# EAGLE board Adafruit_TMP117 (EAGLE 9.6.2)
REV: B
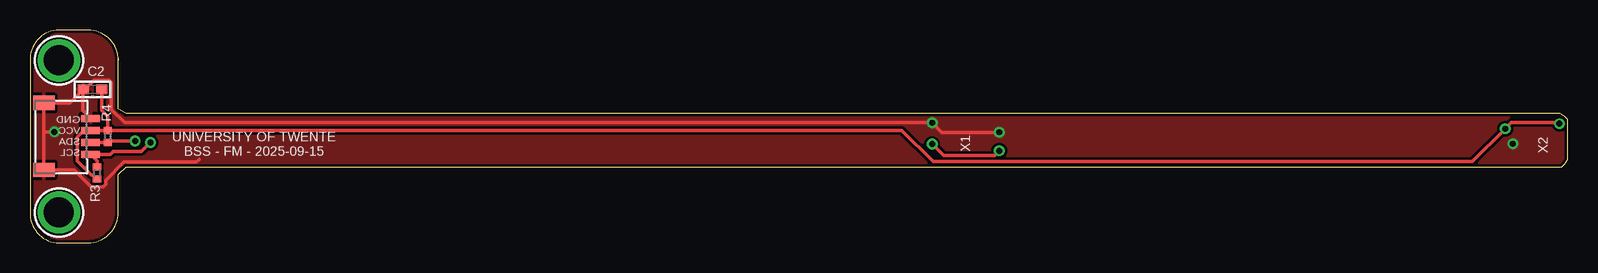
[diagram p0: board, top side]
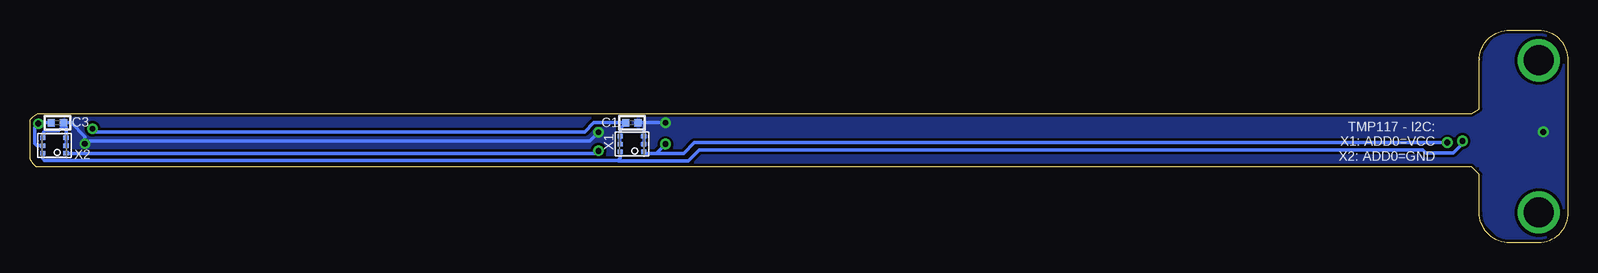
[diagram p1: board, bottom side, seen from below]

Size 128.14 x 17.78 mm. Coordinates in mm from the lower left corner, seen from the top.
Outline: 7.37,15.24 7.37,11.18 8,10.79 127.51,10.79 127.89,10.54 128.14,10.29 128.14,6.99 127.89,6.6 127.64,6.35 8,6.35 7.37,5.71 7.37,2.54 arc-90 4.83,0 2.41,0 arc-90 0,2.54 0,15.24 arc-90 2.41,17.78 4.83,17.78 arc-90 7.37,15.24
Outline: 7.37,15.37 7.37,15.24
Copper layers (1*16): Top 0.035mm / dielectric 1.5mm / Bottom 0.035mm
Design rules "adafruit *": minimum track width 8mil, minimum drill 15.5mil, track to track 8mil, track to pad 8mil, pad to pad 8mil, via to via 8mil, smd to smd 8mil, copper to edge 10mil, drill to drill 8mil, minimum pad ring 10mil, minimum via ring 8mil, stop-mask expansion 2mil, vias tented up to drill 20mil, thermal gap 10mil
Net classes: 1 highpower: width 0.305 mm, drill 0.483 mm; 2 lowpower: width 0.254 mm, drill 0.483 mm
bRestrict: area 77.3,7.2 to 78.6,9.5; area 125.5,7.1 to 126.7,9.1

## Footprints (pad centres in the part's own frame; a part is rotated, then mirrored left to right if it is on the bottom)
_0402 = smd 0.6 x 0.6: 1 -0.508,0; 2 0.508,0
_0603 = smd 0.9 x 0.8: 1 -0.762,0; 2 0.762,0
JST_SH4 = smd 0.6 x 1.55: 1 -1.5,2.514; 2 -0.5,2.514; 3 0.5,2.514; 4 1.5,2.514 | smd 1.2 x 1.8: MT1 -2.8,-1.386; MT2 2.8,-1.386
R0402 = smd 0.6 x 0.7: 1 -0.5,0; 2 0.5,0
MOUNTINGHOLE_2.5_PLATED = drill 2.5 pad 3.2: P$1 0,0
WSON-6 = smd 0.45 x 0.3: 1 -0.975,0.65; 2 -0.975,0; 3 -0.975,-0.65; 4 0.975,-0.65; 5 0.975,0; 6 0.975,0.65

## Placement (x,y rotation side)
C1  0.1uF  [_0402]  77.98,10.03 0 bottom
C2  10uF  [_0603]  5.21,12.83 180 top
C3  0.1uF  [_0402]  125.86,10.03 0 bottom
CONN4  STEMMA_I2C_QT  [JST_SH4]  2.54,8.89 270 top
R3  10k  [R0402]  5.59,5.84 270 top
R4  10k  [R0402]  6.48,8.89 90 top
U$1  MOUNTINGHOLE2.5  [MOUNTINGHOLE_2.5_PLATED]  2.41,15.24 0 top
U$19  MOUNTINGHOLE2.5  [MOUNTINGHOLE_2.5_PLATED]  2.41,2.54 0 top
X1  TMP117_WSON  [WSON-6]  77.98,8.26 180 bottom
X2  TMP117_WSON  [WSON-6]  126.11,8.13 180 bottom

## Library data of the parts
C1-C3 CONN4 = microbuilder
R3 R4 = rcl; SPICEPREFIX: R
U$1 U$19 = microbuilder; BOM: EXCLUDE
X1 X2 = adafruit_sensor

## Nets
GND [highpower]: C1.2 C2.2 C3.2 CONN4.1 CONN4.MT1 CONN4.MT2 X1.2 X1.3 X2.2 X2.3 X2.4
SCL: CONN4.4 R3.1 X1.1 X2.1
SDA: CONN4.3 R4.1 X1.6 X2.6
VCC [highpower]: C1.1 C2.1 C3.1 CONN4.2 R3.2 R4.2 X1.4 X1.5 X2.5

## Tracks (layer width: path | path; a pad name or v marks a point on that pad's centre or on a via)
GND  (via drill 0.48)
  Top 0.305: 1.15,9.14 CONN4.MT1 3.31,11.69 4.38,12.76 | 1.15,9.14 CONN4.MT2 3.69,6.09 5.09,4.69 6.08,4.69 6.29,4.89 6.29,5.22 7.83,6.76 13.87,6.76 14.1,6.99 | 1.15,9.14 1.28,9.27 v2.03,9.27 | 4.38,12.76 C2.2 4.62,12.83 5.37,13.58 6.57,13.58 6.78,13.37 6.78,11.15 7.89,10.03 v75.18,10.03 75.98,9.23 v80.77,9.23 | CONN4.1 4.38,11.06 4.38,12.76 | v123.57,8.28 123.57,8.26
  Bottom 0.305: 76.96,8.9 76.96,10.03 C1.2 v75.18,10.03 | 76.96,8.9 X1.3 | 76.96,8.9 76.96,8.26 X1.2 | C3.2 125.48,10.03 125.14,9.69 X2.3 X2.2 | C3.2 124.71,10.03 123.57,8.89 123.57,8.64 | 123.57,8.64 123.44,8.51 81.5,8.51 v80.77,9.23 | X2.4 127,8.86 127,9.27 126.89,9.38 125.75,9.38 125.35,9.78 C3.2 | 123.57,8.64 v123.57,8.28
  pour Top: 0.13,2.03 2.03,0.13 3.68,0.13 5.46,0.13 7.24,1.91 7.24,2.16 7.24,16.13 7.11,16.26 5.71,17.65 5.46,17.65 1.78,17.65 0.76,16.64 0.13,15.11
  pour Bottom: 7.24,15.37 7.24,2.03 5.33,0.13 1.91,0.13 0.13,1.91 0.13,16.13 1.65,17.65 5.75,17.65
  pour Top: 7.24,10.67 7.24,6.48 127.51,6.48 127.95,6.92 127.95,10.22 127.51,10.67
  pour Bottom: 7.24,6.48 7.24,10.67 124.97,10.67 125.35,10.29 124.59,9.53 124.59,7.49 123.57,6.48
SCL  (via drill 0.48)
  Top 0.305: R3.1 5.59,6.86 CONN4.4 6.71,7.39 6.94,7.62 9.27,7.62 v10.03,8.38 | v80.77,7.68 80.39,7.3 76.14,7.3 v75.18,8.26
  Bottom 0.305: X1.1 76.88,7.48 75.96,7.48 | 75.96,7.48 73.68,7.48 72.77,8.38 v10.03,8.38 | 75.96,7.48 v75.18,8.26 | X2.1 80.98,7.48 v80.77,7.68
SDA  (via drill 0.48)
  Top 0.305: CONN4.3 R4.1 6.6,8.51 v8.76,8.51
  Bottom 0.305: X1.6 78.95,7.1 79.17,6.88 | v8.76,8.51 8.76,8.28 9.52,7.52 11.84,7.52 12.06,7.75 72.39,7.75 73.28,6.86 79.14,6.86 79.17,6.88 | X2.6 127.09,7.03 126.94,6.88 79.17,6.88
VCC  (via drill 0.48)
  Top 0.305: R4.2 5.28,9.39 5.17,9.28 CONN4.2 4.96,9.3 4.39,9.3 3.92,8.84 3.92,6.85 5.09,5.69 5.24,5.69 R3.2 | R4.2 6.48,10.54 5.98,11.05 5.97,11.05 C2.1 | v127.45,9.96 127.37,10.03 123.44,10.03 v122.94,9.53 120.2,6.79 75.26,6.79 72.66,9.39 R4.2
  Bottom 0.305: X2.5 127.1,8.14 127.58,8.14 127.74,8.3 127.74,9.65 127.36,10.03 C3.1 127.37,10.03 v127.45,9.96 | X1.5 78.99,8.26 78.99,8.9 X1.4 78.95,9.57 C1.1 81.15,10.03 81.92,9.27 122.68,9.27 v122.94,9.53

## Text on the board
tNames: X1 | GND / VCC / SDA / SCL | UNIVERSITY OF TWENTE / BSS - FM - 2025-09-15 | X2
bNames: TMP117 - I2C: / X1: ADD0=VCC / X2: ADD0=GND